# Altium PCB CarteTxMoteur.PCBDOC
Units mm, origin at the board's own origin, x right, y up, seen from the top; angles counter-clockwise.
Board outline 299.72 x 199.9 mm, 2 copper layers (Top Layer, Bottom Layer); 16 components, 15 nets, 54 pads, 18 vias.
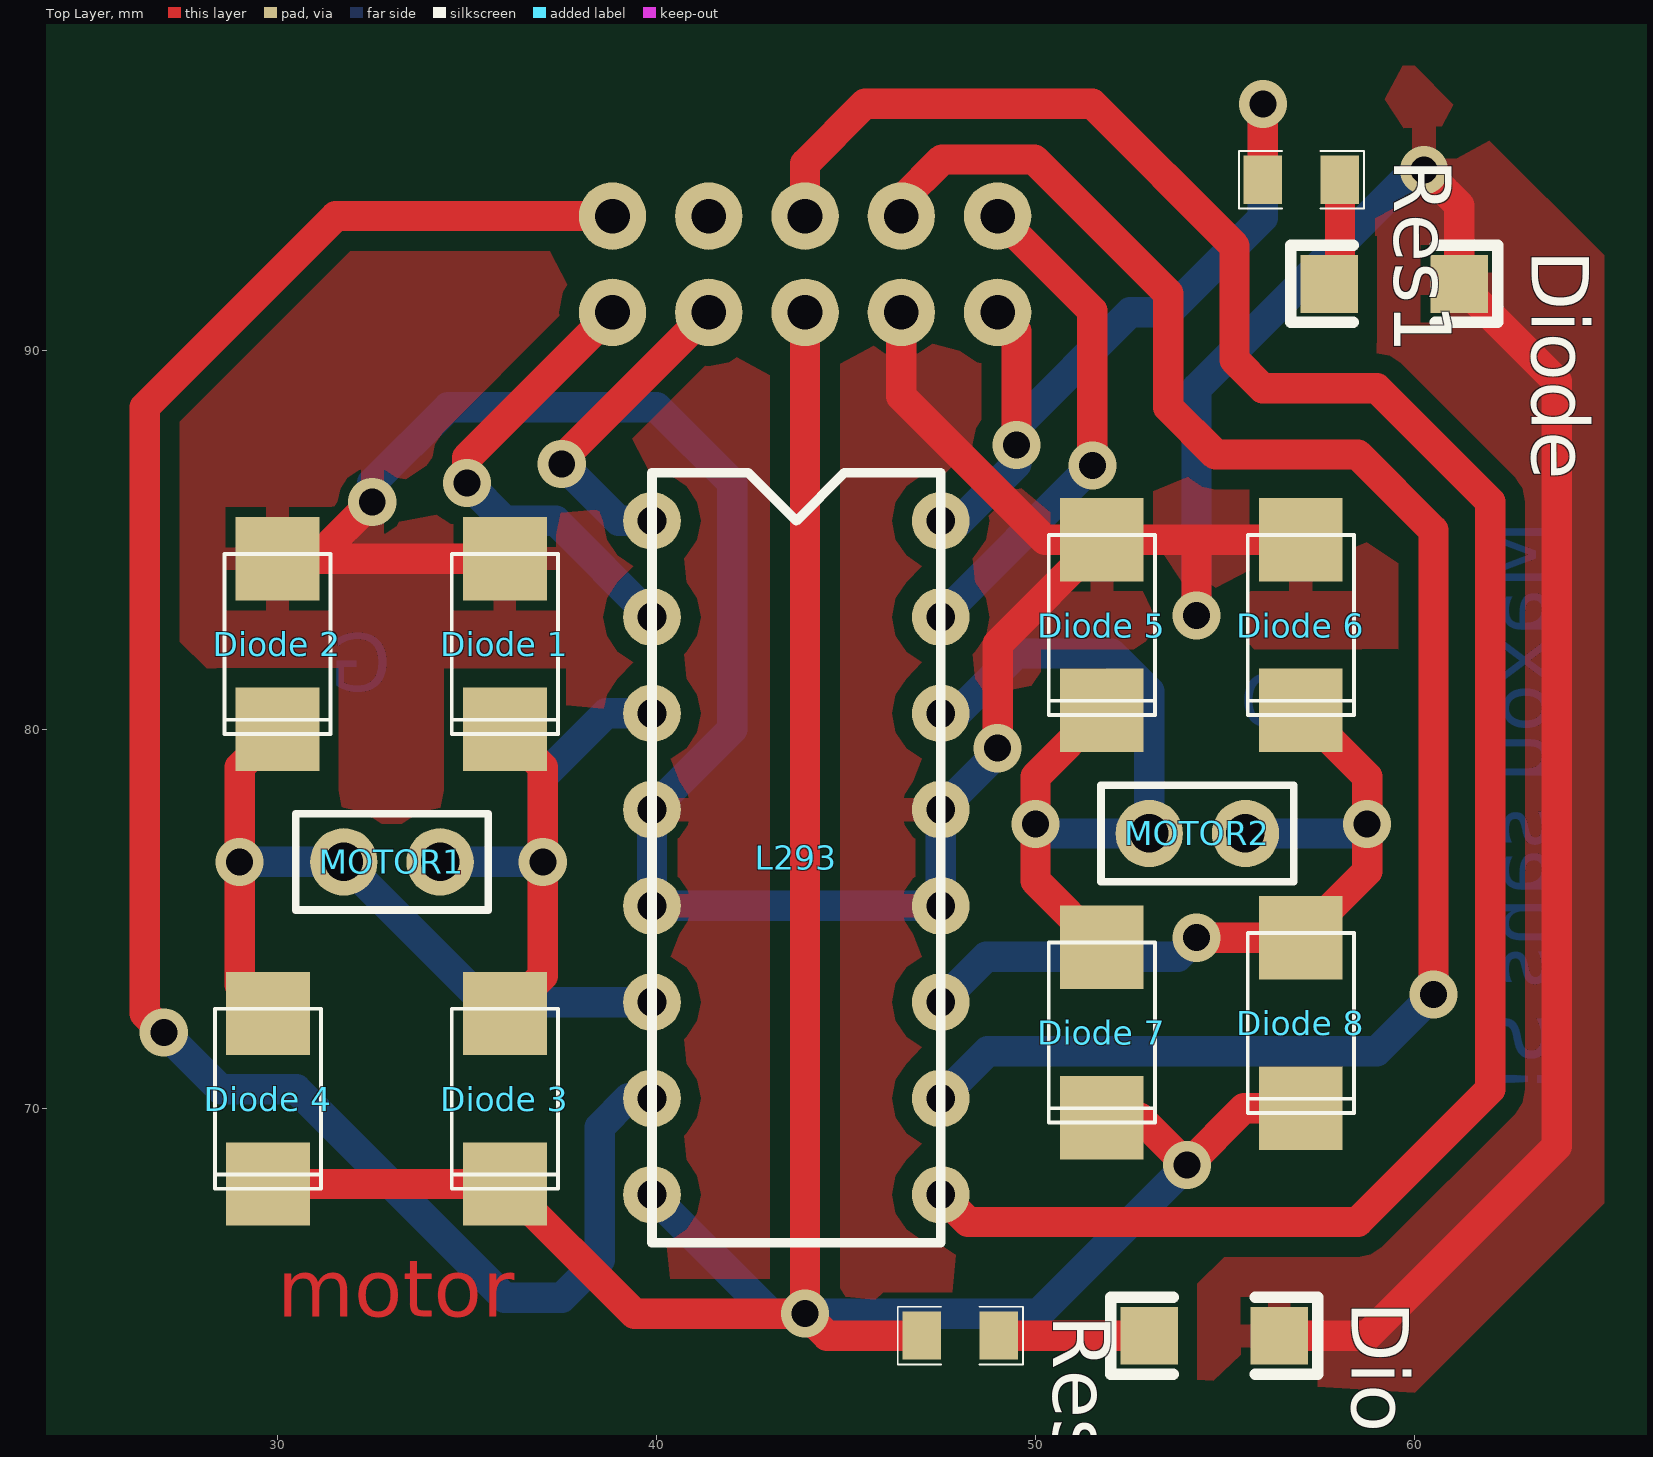
[diagram p0: Top Layer view]
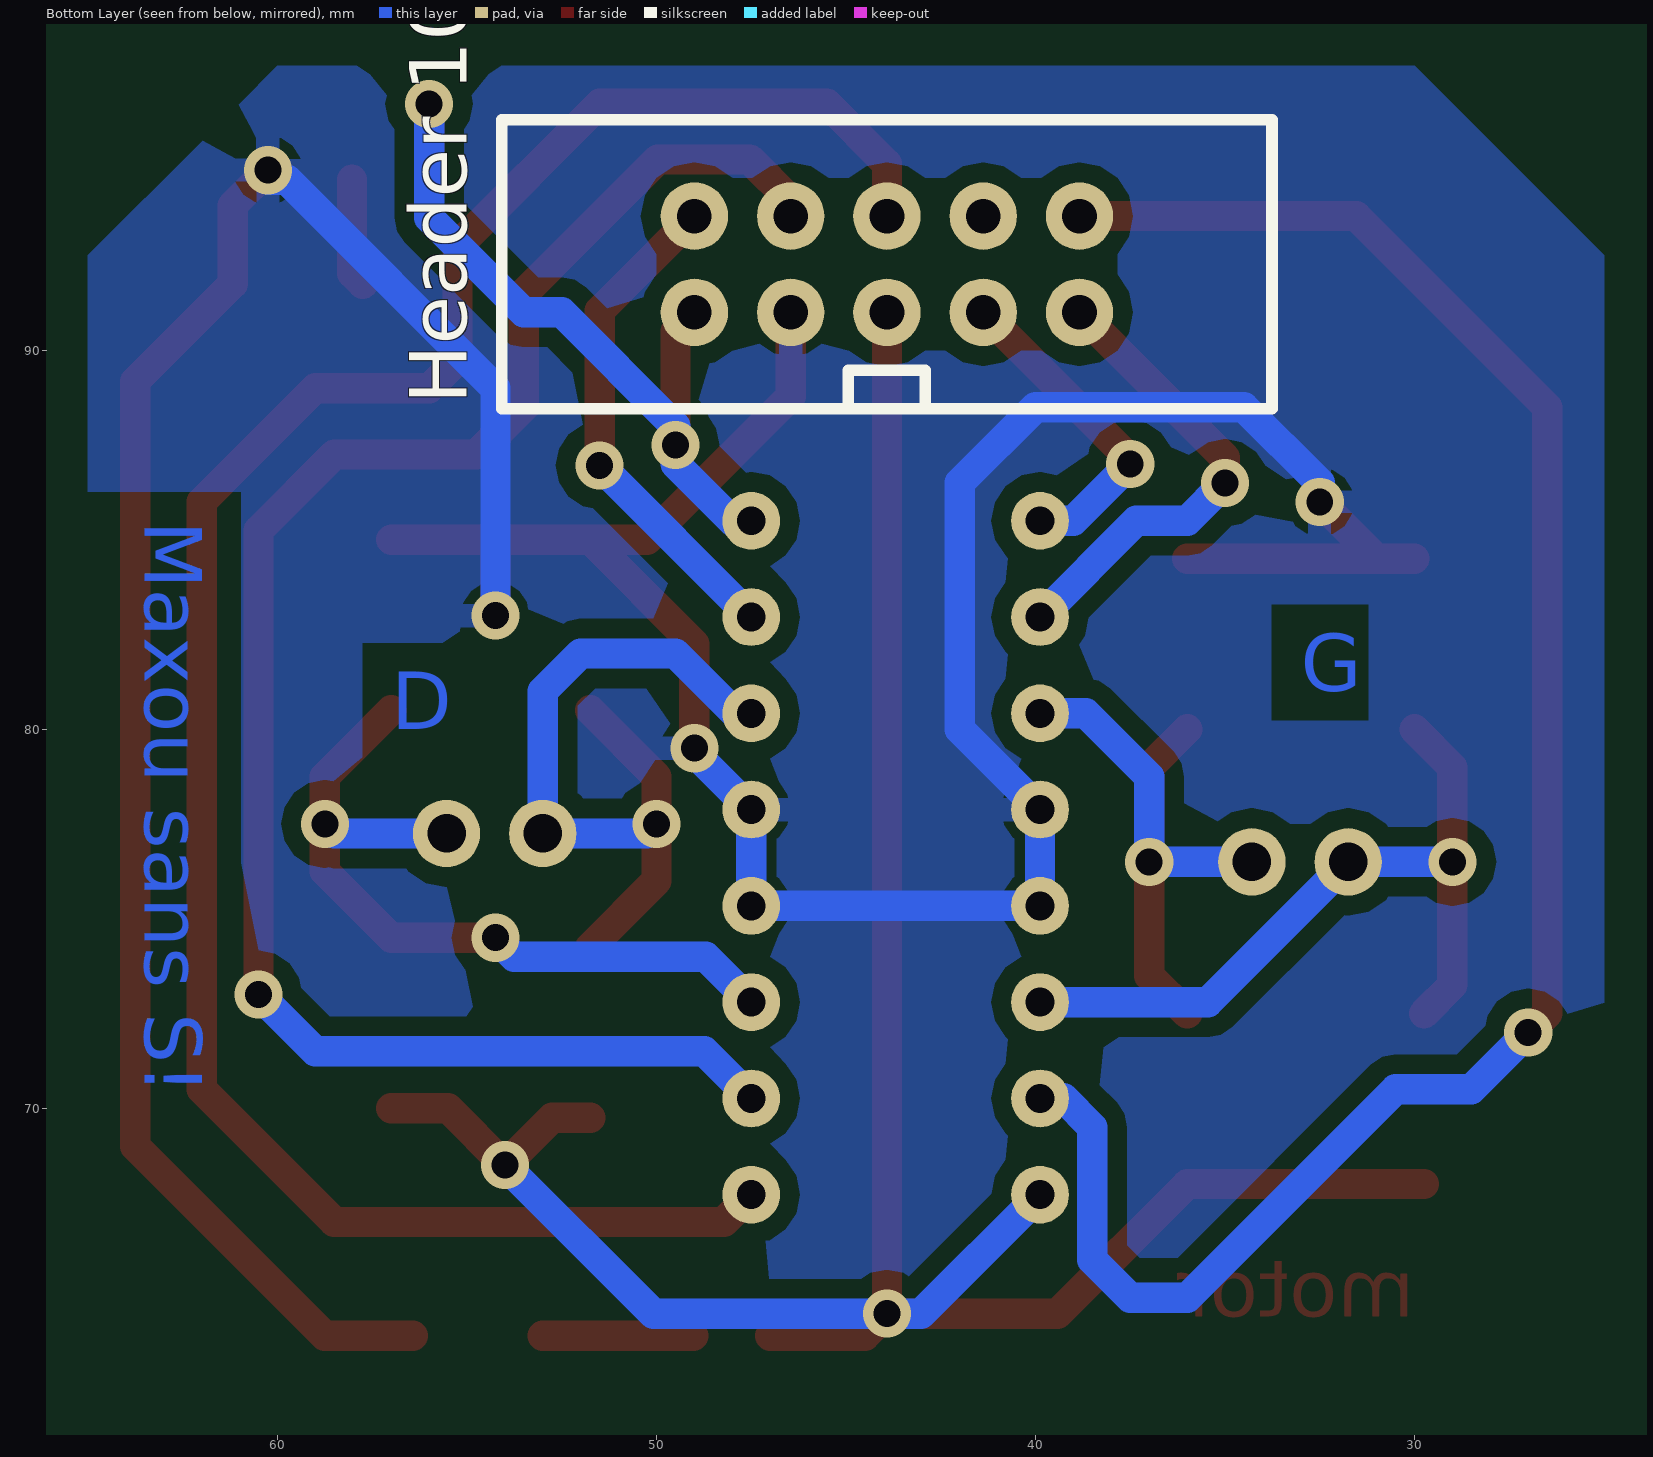
[diagram p1: Bottom Layer view, seen from below]

## Layer stack, top to bottom
Top Solder: solder mask 0.0102, Solder Resist, Dk 3.5
Top Layer: signal copper 0.0356
Dielectric1: dielectric 0.32, FR-4, Dk 4.8
Bottom Layer: signal copper 0.0356
Bottom Solder: solder mask 0.0102, Solder Resist, Dk 3.5

## Board outline
-20.497,-23.403 279.223,-23.403 279.223,176.495 -20.497,176.495

## Design rules (kind name [scope] priority, off if disabled: settings)
Clearance Clearance_bottom_polygon [OnLayer('Bottom Layer') Or OnLayer('Multi-Layer') vs OnLayer('Bottom Layer')  And  InPoly] p1: gap=0.508
Clearance Clearance_top_polygon [OnLayer('Top Layer')  Or OnLayer('Multi-Layer') vs OnLayer('Top Layer') And InPoly] p2: gap=0.508
Clearance Clearance_bottom [OnLayer('Bottom Layer') Or OnLayer('Multi-Layer') vs OnLayer('Bottom Layer')  And Not InPoly] p3: gap=0.203
Clearance Clearance_top [OnLayer('Top Layer')  Or OnLayer('Multi-Layer') vs OnLayer('Top Layer') And Not InPoly] p4: gap=0.203
Clearance Clearance_pad_to_pad [OnLayer('Multi-Layer') vs OnLayer('Multi-Layer')] p5: gap=0.254
ComponentClearance ComponentClearance_bottom [OnLayer('Bottom Overlay') vs OnLayer('Bottom Overlay')] p1: gap=0 collisioncheckmode=3 verticalgap=0.254 showdistances=FALSE
ComponentClearance ComponentClearance_top [OnLayer('Top Overlay') vs OnLayer('Top Overlay')] p2: gap=0 collisioncheckmode=3 verticalgap=0.254 showdistances=FALSE
FabricationTestPointUsage TestPointUsage [All] p1: valid=0 allowmultiple=FALSE
FabricationTestpoint Testpoint [All] p1: side=3 testpointundercomponent=TRUE minsize=1.016 maxsize=2.54 preferedsize=1.524 minholesize=0 maxholesize=1.016 preferedholesize=0.813 testpointgrid=0.025 allowsidetop=TRUE allowsidebottom=TRUE usegrid=TRUE gridtolerance=0
HoleSize [All] p1: absolutevalues=TRUE maxlimit=25.4 minlimit=0.406 maxpercent=80.000 minpercent=20.000
MinimumAnnularRing [PadXSize_AllLayers = PadYSize_AllLayers] p1: minimumring=0.203
PermittedLayers [All] p1: toplayerpermitted=TRUE bottomlayerpermitted=TRUE
PolygonConnect [All] p1: connectstyle=Relief reliefconductorwidth=0.61 reliefentries=4 polygonreliefangle="90 Angle" airgapwidth=0.254
RoutingVias [All] p1: holewidth=0.406 width=0.813 viastyle="Through Hole" minholewidth=0.4 minwidth=0.8 maxholewidth=0.6 maxwidth=10
SMDToPlane [All] p1: distance=0
SolderMaskExpansion [All] p1: expansion=0.102
ViasUnderSMD [All] p1: allowed=FALSE
Width Width_botom_top [OnLayer('Bottom Layer') or OnLayer('Top Layer')] p1: maxlimit=254 minlimit=0.254 preferedwidth=0.813 minimp=50.000000 maximp=50.000000 favimp=50.000000
25 further rules are at their usual default settings.

## Components (designator, comment, footprint, x,y, rotation, side; value= is the part's Value field where it differs from the comment)
Diode "RES" 1206 57.75,91.75 r0 top
Diode1 "RES" 1206 53,64 r0 top
"Diode 1" "DiodeRedresseuse" "Diode MULTICOMP SS16" 36,82.25 r270 top
"Diode 2" "DiodeRedresseuse" "Diode MULTICOMP SS16" 30,82.25 r270 top
"Diode 3" "DiodeRedresseuse" "Diode MULTICOMP SS16" 36,70.25 r270 top
"Diode 4" "DiodeRedresseuse" "Diode MULTICOMP SS16" 29.75,70.25 r270 top
"Diode 5" "DiodeRedresseuse" "Diode MULTICOMP SS16" 51.75,82.75 r270 top
"Diode 6" "DiodeRedresseuse" "Diode MULTICOMP SS16" 57,82.75 r270 top
"Diode 7" "DiodeRedresseuse" "Diode MULTICOMP SS16" 51.75,72 r270 top
"Diode 8" "DiodeRedresseuse" "Diode MULTICOMP SS16" 57,72.25 r270 top
"Header 10" "comment" HE10-10V 49,91 r90 bottom
L293 "L293NE" L293NE 47.5,85.5 r0 top
MOTOR1 "JUMPER2" JMP2-100 31.75,76.5 r0 top
MOTOR2 "JUMPER2" JMP2-100 53,77.25 r0 top
Res1 "RES" 0805 56,94.5 r0 top
Res2 "RES" 0805 47,64 r0 top

## Footprints (in the part's own frame and the unit in brackets; to place one, negate y for a bottom-side part, rotate by r counter-clockwise, add the part's x,y. Pads: shape width x height; smd on the part's side, far side on the other; paste and mask are expansions set on the pad)
0805 [mil]
  rect 40x50 smd: 1(0,0) 2(80,0)
  silkscreen extent -25,-30 105,30
1206 [mil]
  rect 60x60 smd: 1(0,0) 2(135,0)
  silkscreen extent -40,-40 175,40
"Diode MULTICOMP SS16" [mm]
  rect 2.2x2.21 smd: 1(-2.25,0) 2(2.25,0)
  silkscreen extent -2.37,-1.4 2.37,1.4
HE10-10V [mil]
  round 70 hole 36: 1(0,0) 2(100,0) 3(0,-100) 4(100,-100) 5(0,-200) 6(100,-200) 7(0,-300) 8(100,-300) 9(0,-400) 10(100,-400)
  silkscreen extent -100,-600 200,200
JMP2-100 [mil]
  round 70 hole 40: 1(0,0) 2(100,0)
  silkscreen extent -50,-50 150,50
L293NE [mil]
  round 60 hole 30: 1(-300,0) 2(-300,-100) 3(-300,-200) 4(-300,-300) 5(-300,-400) 6(-300,-500) 7(-300,-600) 8(-300,-700) 9(0,0) 10(0,-100) 11(0,-200) 12(0,-300) 13(0,-400) 14(0,-500) 15(0,-600) 16(0,-700)
  silkscreen extent -300,-750 0,50

## Part data
Diode Diode1 Res1 Res2: "resistance"
"Header 10": library part HE10-10, "10-pin connector"
MOTOR1 MOTOR2: "cavalier 1 position"

## Via types
v1: diameter 1.27, hole 0.711, Top Layer to Bottom Layer, 18 vias

## Nets (pads, with @x,y where several pads share a name; then routed paths per layer and width w, separated by ;. In a path a pad name is that pad's centre, name@x,y a point inside that pad or via, vN(x,y) a via of type N, cw(c..) or ccw(c..) an arc to the next point about the centre after c; other vN are vias at no path point)
ENABLE1: "Header 10.7" L293.1 | length 8.6
  Top Layer w0.8: v1(37.5,87) 37.5,87.12 41.38,91
  Bottom Layer w0.8: v1(37.5,87) 39,85.5 L293.1
ENABLE2: "Header 10.6" L293.16 | length 58
  Top Layer w0.8: 43.92,93.54 43.92,94.92 45.5,96.5 51.5,96.5 55.25,92.75 55.25,89.75 56,89 59,89 62,86 62,70.5 58.5,67 48.22,67 L293.16
GND: "Diode 1.1" "Diode 2.1" "Diode 5.1" "Diode 6.1" "Header 10.3" Diode1.2 Diode.2 L293.4 L293.5 L293.12 L293.13 | length 118
  Top Layer w0.8: 30,84.5 31,84.5 ; v1(32.5,86) 31,84.5 ; 36,84.5 31,84.5 ; 46.46,91 46.46,88.789 50.249,85 51.75,85 ; v1(49,79.5) 49,82.25 51.75,85 ; v1(54.25,83) 54.25,85 ; Diode1.2 58.75,64 63.75,69 63.75,89.179 Diode.2 61.179,93.821 v1(60.25,94.75) ; 57,85 54.25,85 ; 51.75,85 54.25,85
  Bottom Layer w0.8: v1(32.5,86) 32.5,86.5 34.5,88.5 40,88.5 42,86.5 42,80 L293.4 L293.5 L293.13 L293.12 49,79.38 v1(49,79.5) ; v1(54.25,83) 54.25,89 59.75,94.5 v1@60.25,94.5
MOTOR1_IN1: "Header 10.9" L293.2 | length 12.4
  Top Layer w0.8: v1(35,86.5) 35,87.16 38.84,91
  Bottom Layer w0.8: v1(35,86.5) 36,85.5 37.34,85.5 L293.2
MOTOR1_IN2: "Header 10.10" L293.7 | length 51.5
  Top Layer w0.8: v1(27,72) 26.5,72.5 26.5,88.5 31.54,93.54 38.84,93.54
  Bottom Layer w0.8: v1(27,72) 28.5,70.5 30.5,70.5 36,65 37.5,65 38.5,66 38.5,69.5 39.26,70.26 L293.7 L293.7@39.64,70.5
MOTOR2_IN1: "Header 10.2" L293.10 | length 13.3
  Top Layer w0.8: 49,93.54 51.5,91.04 v1(51.5,86.96)
  Bottom Layer w0.8: L293.10 v1(51.5,86.96)
MOTOR2_IN2: "Header 10.4" L293.15 | length 47.1
  Top Layer w0.8: 46.46,93.54 46.46,93.96 47.532,95.032 49.968,95.032 53.503,91.497 53.503,88.497 54.75,87.25 58.5,87.25 60.5,85.25 v1(60.5,73)
  Bottom Layer w0.8: L293.15 48.74,71.5 59,71.5 v1(60.5,73)
NetDiode1_1: Diode1.1 Res2.2 | length 4
  Top Layer w0.8: Res2.2 Diode1.1
"Netdiode 1_2": "Diode 1.2" "Diode 3.1" L293.3 MOTOR1.2 | length 16.9
  Top Layer w0.8: 36,72.5 37,73.5 v1(37,76.5) 37,79 36,80
  Bottom Layer w0.8: MOTOR1.2 v1(37,76.5) 37,78.75 38.67,80.42 L293.3
"Netdiode 2_2": "Diode 2.2" "Diode 4.1" L293.6 MOTOR1.1 | length 20.6
  Top Layer w0.8: 29.75,72.5 29,73.25 v1(29,76.5) 29,79 30,80
  Bottom Layer w0.8: v1(29,76.5) MOTOR1.1 35.45,72.8 L293.6
"Netdiode 5_2": "Diode 5.2" "Diode 7.1" L293.11 MOTOR2.1 | length 20.8
  Top Layer w0.8: 51.75,74.25 50,76 v1(50,77.5) 50,78.749 51.75,80.499
  Bottom Layer w0.8: L293.11 47.92,80.42 49.5,82 52,82 53,81 MOTOR2.1 v1@50.25,77.25
"Netdiode 6_2": "Diode 6.2" "Diode 8.1" L293.14 MOTOR2.2 | length 20.6
  Top Layer w0.8: v1(54.25,74.5) 57,74.5 58.75,76.25 v1(58.75,77.5) 58.75,78.75 57,80.5
  Bottom Layer w0.8: L293.14 48.7,74 53.75,74 v1(54.25,74.5) ; MOTOR2.2 v1@58.5,77.25
NetDiode_1: Diode.1 Res1.2 | length 2.9
  Top Layer w0.8: Diode.1 58.032,92.032 Res1.2
"VCC1 5V": "Header 10.1" L293.9 Res1.1 | length 20.6
  Top Layer w0.8: 49,91 49.5,90.5 v1(49.5,87.5) ; Res1.1 v1(56,96.5)
  Bottom Layer w0.8: L293.9 48,85.5 v1@49.5,87 ; v1(49.5,87.5) 49.5,88 52.5,91 53.5,91 56,93.5 v1(56,96.5)
"VCC2 8V": "Diode 3.2" "Diode 4.2" "Diode 7.2" "Diode 8.2" "Header 10.5" L293.8 Res2.1 | length 68.8
  Top Layer w0.8: 29.75,68 36,68 39.42,64.58 v1(43.92,64.58) ; 43.92,91 v1(43.92,64.58) ; Res2.1 44.5,64 v1(43.92,64.58) ; 51.75,69.75 52.75,69.75 v1(54,68.5) 55.5,70 57,70
  Bottom Layer w0.8: L293.8 43.02,64.58 v1(43.92,64.58) 50.08,64.58 v1(54,68.5)
pads on no net: "Header 10.8"

## Polygon pours and split planes (outlines as drawn)
GND on Top Layer "Bottom Layer-No Net" (solid, remove dead copper, pour order 6): 30,97.5 25,92.5 25,67.5 30,62.5 60,62.5 65,67.5 65,92.5 60,97.5
GND on Bottom Layer "Bottom Layer-No Net" (solid, remove dead copper, pour order 12): 60,62.5 65,67.5 65,92.5 60,97.5 30,97.5 25,92.5 25,67.5 30,62.5

## Keep-outs
Keep-Out Layer:
  rectangle: -19.537,-19.743 -14.537,180.257
  rectangle: -14.537,-19.743 275.463,-14.743
  rectangle: 270.463,-14.743 275.463,180.257
  rectangle: -14.537,175.257 270.463,180.257

## Other copper
Top Layer:
  text "motor" at 30,64.5 h1.52
Bottom Layer:
  text "Maxou sans S!" at 63.5,85.5 h1.52 r90
  text "G" at 33,81 h1.52
  text "D" at 57,80 h1.52

## Silkscreen, mask and mechanical layers (free items; w line width, h text height)
Mechanical 1:
  lines w0.254: 25,67.5 25,92.5 30,97.5 60,97.5 65,92.5 65,67.5 60,62.5 30,62.5 25,67.5